# Altium PCB 3phasedriver_rev2.PcbDoc
Units mm, origin at the board's own origin, x right, y up, seen from the top; angles counter-clockwise.
Board outline 82.93 x 49.66 mm, 2 copper layers (Top Layer, Bottom Layer); 53 components, 69 nets, 251 pads, 107 vias.
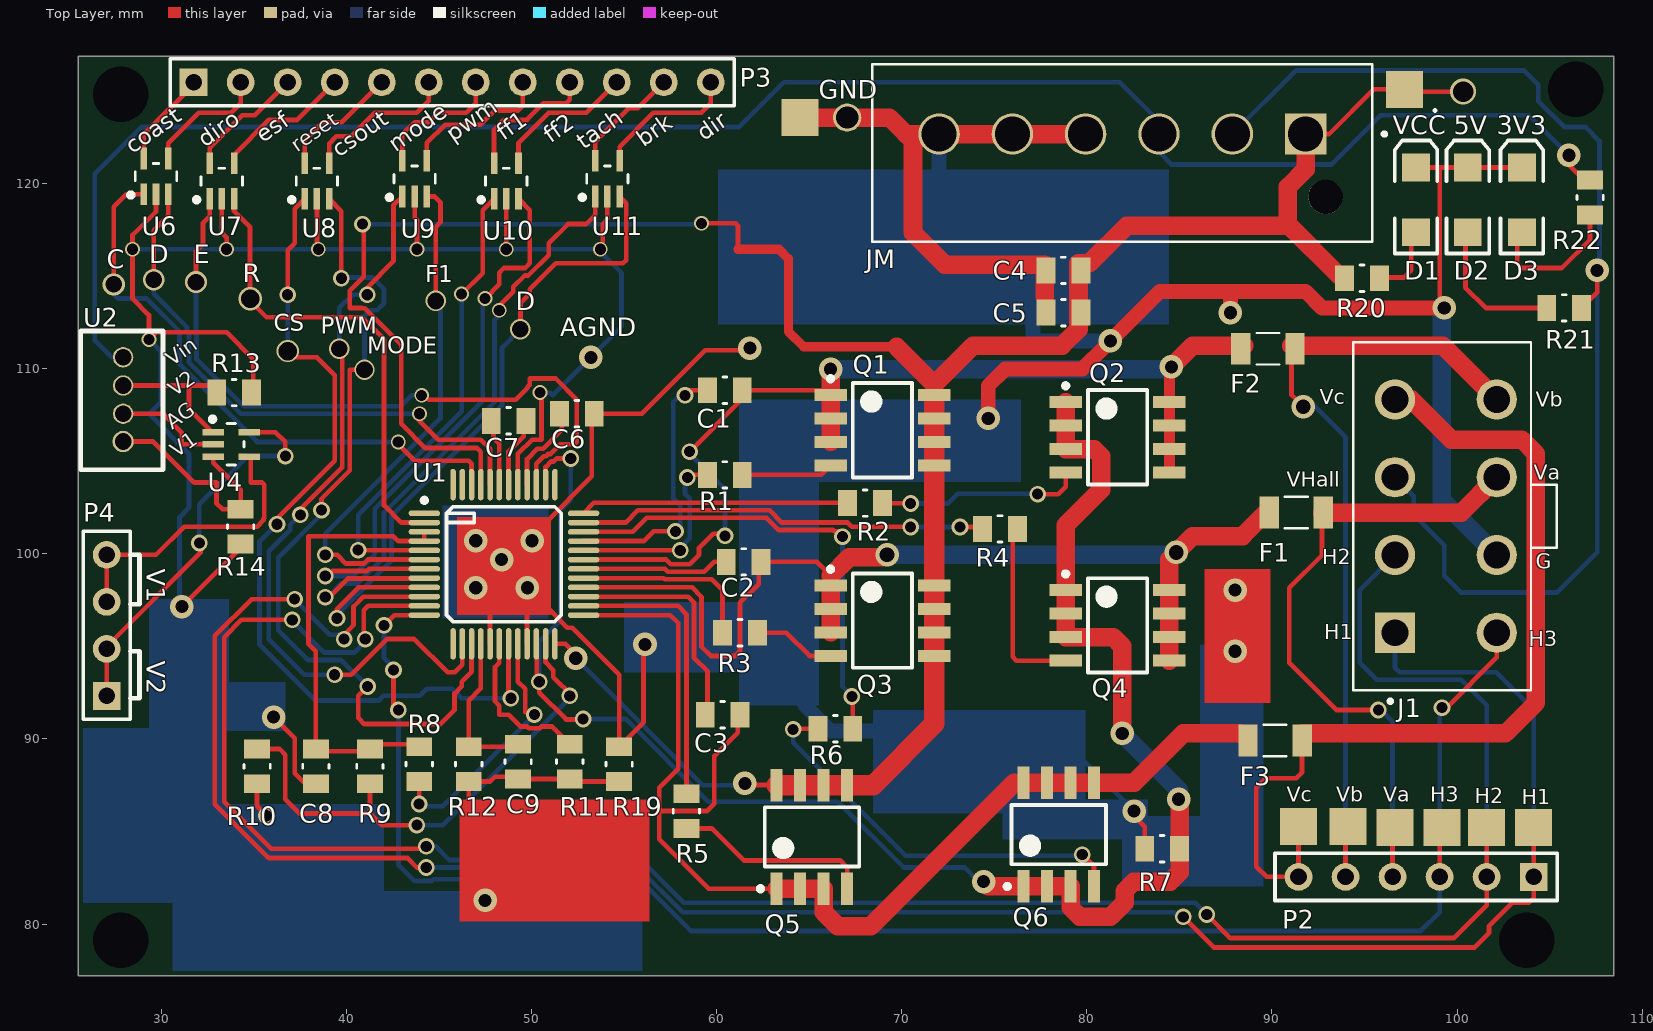
[diagram p0: Top Layer view]
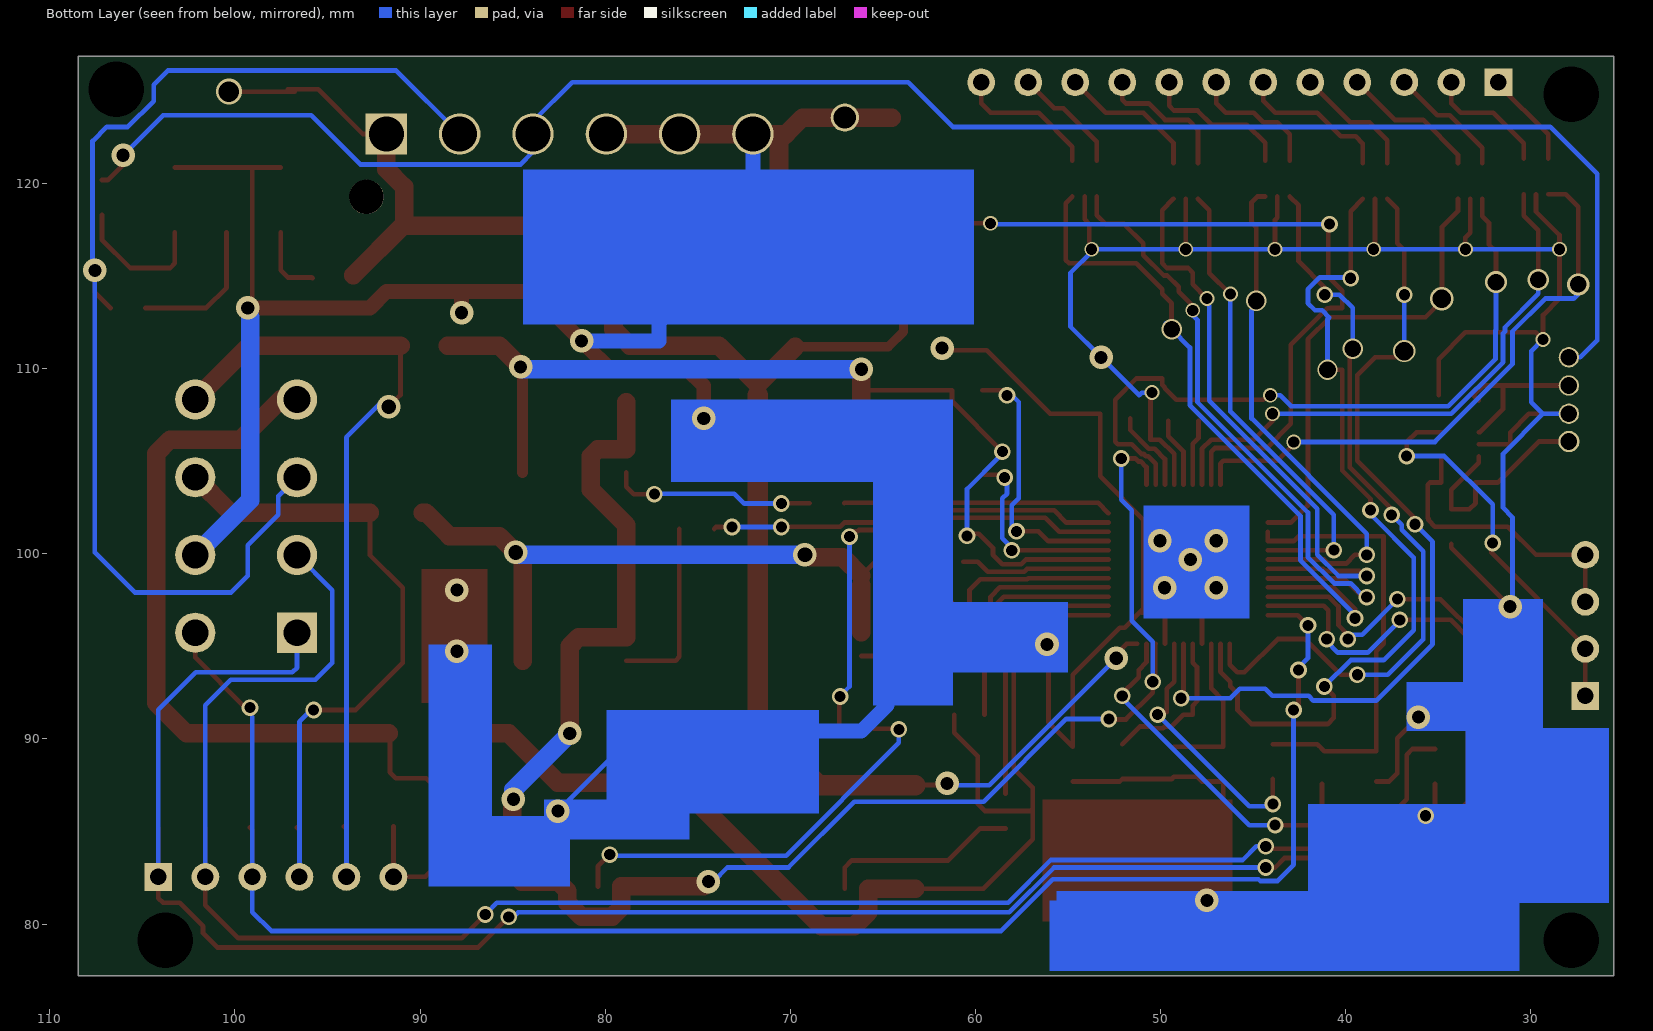
[diagram p1: Bottom Layer view, seen from below]

## Layer stack, top to bottom
Top Solder: solder mask 0.0102, Solder Resist, Dk 3.5
Top Layer: signal copper 0.0356
Dielectric 1: dielectric 0.32, FR-4, Dk 4.8
Bottom Layer: signal copper 0.0356
Bottom Solder: solder mask 0.0102, Solder Resist, Dk 3.5

## Board outline
25.527,126.873 108.458,126.873 108.458,77.216 25.527,77.216

## Design rules (kind name [scope] priority, off if disabled: settings)
Clearance [All] p1: gap=0.15 ignorepadtopadclearanceinfootprint=FALSE except(0: Arc-Hole Track-Hole SMDPad-Hole THPad-Hole Via-Hole Fill-Hole Poly-Hole Region-Hole Text-Hole)
ComponentClearance [All] p1: gap=0.2 collisioncheckmode=3 verticalgap=0.254 showdistances=FALSE
HoleSize [All] p1: absolutevalues=TRUE maxlimit=6 minlimit=0.025 maxpercent=80.000 minpercent=20.000
MinimumSolderMaskSliver [All] p1 off: minsoldermaskwidth=0.14
NetAntennae [All] p1 off: netantennaetolerance=0
PolygonConnect [All] p1: connectstyle=Relief reliefconductorwidth=0.254 reliefentries=4 polygonreliefangle="90 Angle" airgapwidth=0.254
RoutingVias [All] p1: holewidth=0.711 width=1.27 viastyle="Through Hole" minholewidth=0.5 minwidth=1 maxholewidth=4 maxwidth=4
SilkToSilkClearance [All] p1 off: silktosilkclearance=0.254
SilkToSolderMaskClearance [IsPad] p1 off: minsilkscreentomaskgap=0.1 clearancetoexposedcopper=TRUE
SolderMaskExpansion [All] p1: expansion=0.102
Width [All] p1: maxlimit=2 minlimit=0.2 preferedwidth=0.254
24 further rules are at their usual default settings.

## Components (designator, comment, footprint, x,y, rotation, side; value= is the part's Value field where it differs from the comment)
C1 "82nF" 0805 60.452,108.839 r0 top
C2 "82nF" 0805 61.468,99.568 r0 top
C3 "82nF" 0805 60.325,91.313 r0 top
C4 "1uF" 0805 78.74,115.316 r0 top
C5 "1uF" 0805 78.74,113.03 r0 top
C6 "1uF" 0805 52.451,107.569 r180 top
C7 "100nF" 0805 48.768,107.188 r0 top
C8 "1uF" 0805 38.354,88.519 r90 top
C9 "1nF" 0805 49.276,88.773 r90 top
D1 "LED2" 3.2X1.6X1.1 97.79,119.126 r90 top
D2 "LED2" 3.2X1.6X1.1 100.584,119.126 r90 top
D3 "LED2" 3.2X1.6X1.1 103.505,119.126 r90 top
F1 "Fuse 10A 1206" 1206 91.313,102.235 r0 top
F2 "Fuse 10A 1206" 1206 89.789,111.079 r0 top
F3 "Fuse 10A 1206" 1206 90.17,89.916 r0 top
J1 "Motor Molex Connector" *MOLEX_0039281083 99.397,102.04 r90 top value=N/A
JM "CONN HEADER VERT 6POS 3.96MM" "CONN HDR 6POS 3.96MM" 91.821,122.682 r180 top
P2 "Header 6" HDR1X6 104.14,82.55 r180 top
P3 "Header 12" HDR1X12 31.75,125.476 r0 top
P4 "Header 4" HDR1X4 27.051,92.329 r90 top
Q1 "N-Channel" "8-SOIC MOSFET" 68.961,106.68 r0 top
Q2 "N-Channel" "8-SOIC MOSFET" 81.661,106.299 r0 top
Q3 "N-Channel" "8-SOIC MOSFET" 68.961,96.393 r0 top
Q4 "N-Channel" "8-SOIC MOSFET" 81.661,96.139 r0 top
Q5 "N-Channel" "8-SOIC MOSFET" 65.151,84.709 r90 top
Q6 "N-Channel" "8-SOIC MOSFET" 78.486,84.836 r90 top
R1 "0 Ohm" RESC2013X65N 60.452,104.267 r180 top value=0
R2 "0 Ohm" RESC2013X65N 68.021,102.743 r180 top value=0
R3 "0 Ohm" RESC2013X65N 61.265,95.74 r180 top value=0
R4 "0 Ohm" RESC2013X65N 75.311,101.346 r180 top value=0
R5 "0 Ohm" RESC2013X65N 58.374,86.106 r90 top value=0
R6 "0 Ohm" RESC2013X65N 66.421,90.551 r0 top value=0
R7 "20mOhm" 0805 84.074,84.074 r0 top
R8 "100k" 0805 43.936,88.646 r270 top
R9 "150k" 0805 41.275,88.519 r270 top
R10 "10k" 0805 35.179,88.519 r270 top
R11 "5.1k" 0805 52.07,88.773 r270 top
R12 "47k" RESC2013X65N 46.609,88.646 r270 top
R13 "5.1k" 0805 33.934,108.712 r180 top
R14 "5.1k" 0805 34.29,101.473 r90 top
R19 "0 Ohm" RESC2013X65N 54.737,88.646 r90 top value=0
R20 "1.96K" 0805 94.869,114.889 r0 top value=1.96k
R21 "270" 0805 105.791,113.284 r180 top
R22 "110" 0805 107.188,119.253 r270 top
U1 "A3931" CQFP50P900X900X160-48N 48.514,99.441 r0 top
U2 "Encoder" EncoderConnector 27.813,108.99 r90 top value=N/A
U4 "EMI" SOT-665 33.782,105.918 r0 top
U6 "EMI" SOT-665 29.718,120.396 r90 top
U7 "EMI" SOT-665 33.274,120.142 r90 top
U8 "EMI" SOT-665 38.411,120.142 r90 top
U9 "EMI" SOT-665 43.688,120.269 r90 top
U10 "EMI" SOT-665 48.641,120.142 r90 top
U11 "EMI" SOT-665 54.102,120.269 r90 top

## Footprints (in the part's own frame and the unit in brackets; to place one, negate y for a bottom-side part, rotate by r counter-clockwise, add the part's x,y. Pads: shape width x height; smd on the part's side, far side on the other; paste and mask are expansions set on the pad)
3.2X1.6X1.1 [mm]
  rect 1.5x1.5 smd: 1(-1.75,0) 2(1.75,0)
  silkscreen extent -2.9,-1.15 3.2,1.15
"8-SOIC MOSFET" [mm]
  rect 1.75x0.65 smd: D(2.8,-1.905) D(2.8,-0.635) D(2.8,0.635) D(2.8,1.905) G(-2.8,-1.905) S(-2.8,-0.635) S(-2.8,0.635) S(-2.8,1.905)
  silkscreen extent -2.92,-2.55 1.6,2.9, body extent -2,-2.55 2,2.55, height 1.7
0805 [mil]
  rect 40x55 smd: 1(-37,0) 2(37,0)
  silkscreen extent -4,-28 4,28
1206 [mm]
  rect 1.05x1.72 smd: 1(-1.46,0) 2(1.46,0)
  silkscreen extent -0.62,-0.85 0.62,0.85
*MOLEX_0039281083 [mm]
  rect 2.175x2.175 hole 1.45: 1(-6.3,2.75)
  round 2.175 hole 1.45: 2(-2.1,2.75) 3(2.1,2.75) 4(6.3,2.75) 5(-6.3,-2.75) 6(-2.1,-2.75) 7(2.1,-2.75) 8(6.3,-2.75)
  silkscreen extent -10.1,-6 9.4,5
"CONN HDR 6POS 3.96MM" [mm]
  rect 2.24x2.24 hole 1.89: 1(0,0)
  round 2.24 hole 1.89: 2(3.96,0) 3(7.92,0) 4(11.88,0) 5(15.84,0) 6(19.8,0)
  round 1.86 hole 1.86 unplated: None(-1.08,3.4)
  silkscreen extent -4.36,-3.76 23.41,5.82
CQFP50P900X900X160-48N [mm]
  oval 1.7x0.3 smd: 1(-4.3,2.75) 2(-4.3,2.25) 3(-4.3,1.75) 4(-4.3,1.25) 5(-4.3,0.75) 6(-4.3,0.25) 7(-4.3,-0.25) 8(-4.3,-0.75) 9(-4.3,-1.25) 10(-4.3,-1.75) 11(-4.3,-2.25) 12(-4.3,-2.75) 25(4.3,-2.75) 26(4.3,-2.25) 27(4.3,-1.75) 28(4.3,-1.25) 29(4.3,-0.75) 30(4.3,-0.25) 31(4.3,0.25) 32(4.3,0.75) 33(4.3,1.25) 34(4.3,1.75) 35(4.3,2.25) 36(4.3,2.75)
  oval 0.3x1.7 smd: 13(-2.75,-4.3) 14(-2.25,-4.3) 15(-1.75,-4.3) 16(-1.25,-4.3) 17(-0.75,-4.3) 18(-0.25,-4.3) 19(0.25,-4.3) 20(0.75,-4.3) 21(1.25,-4.3) 22(1.75,-4.3) 23(2.25,-4.3) 24(2.75,-4.3) 37(2.75,4.3) 38(2.25,4.3) 39(1.75,4.3) 40(1.25,4.3) 41(0.75,4.3) 42(0.25,4.3) 43(-0.25,4.3) 44(-0.75,4.3) 45(-1.25,4.3) 46(-1.75,4.3) 47(-2.25,4.3) 48(-2.75,4.3)
  silkscreen extent -4.42,-3.1 3.1,3.57, body extent -3.5,-3.5 3.5,3.5, height 1.6
EncoderConnector [mm] "CONN HEADER R/A 4POS 1.5MM"
  round 1.1 hole 0.9: 5V(1.627,-0.127) GND(-1.421,-0.127) VIN2(0.103,-0.127)
  round 1.15 hole 0.9: VIN1(-2.921,-0.127)
  silkscreen extent -4.44,-2.29 3.06,2.16
HDR1X4 [mm] "Connector; Header; 4 Position"
  rect 1.5x1.5 hole 0.9: 1(0,0)
  round 1.5 hole 0.9: 2(2.54,0) 3(5.08,0) 4(7.62,0)
  silkscreen extent -1.27,-1.27 8.89,1.27
HDR1X6 [mm] "Connector; Header; 6 Position"
  rect 1.5x1.5 hole 0.9: 1(0,0)
  round 1.5 hole 0.9: 2(2.54,0) 3(5.08,0) 4(7.62,0) 5(10.16,0) 6(12.7,0)
  silkscreen extent -1.27,-1.27 13.97,1.27
HDR1X12 [mm] "Connector; Header; 12 Position"
  rect 1.5x1.5 hole 0.9: 1(0,0)
  round 1.5 hole 0.9: 2(2.54,0) 3(5.08,0) 4(7.62,0) 5(10.16,0) 6(12.7,0) 7(15.24,0) 8(17.78,0) 9(20.32,0) 10(22.86,0) 11(25.4,0) 12(27.94,0)
  silkscreen extent -1.27,-1.27 29.21,1.27
RESC2013X65N [mil]
  rect 40x55 smd: 1(-37,0) 2(37,0)
  silkscreen extent -4,-28 4,28
SOT-665 [mil]
  rect 46x14 smd: 1(-38,26) 2(-38,0) 3(-38,-26) 4(38,-26) 5(38,26)
  silkscreen extent -45,-44 27,59

## Part data
C1 C2 C3: library part "CAP 82nF 0805", "0.082µF ±5% 50V Ceramic Capacitor X7R 0805 (2012 Metric)", Package=0805, Rating=50V, Tolerance=5%, Digikey=311-4285-1-ND, Digikey Link=https://www.digikey.ca/product-detail/en/yageo/CC0805JRX7R9BB823/311-4285-1-ND/8025374, MF=Yageo, MP=CC0805JRX7R9BB823, Price="0.223 CAD"
C4 C5 C6 C8: library part "CAP 1uF 0805", "CAP CER 1UF 50V X7R 0805", Package=0805, Rating=50V, Tolerance=10%, Digikey=1276-1029-1-ND, Digikey Link=https://www.digikey.ca/product-detail/en/samsung-electro-mechanics/CL21B105KBFNNNE/1276-1029-1-ND/3889115, MF="Samsung Electro-Mechanics", MP=CL21B105KBFNNNE, Price="0,172 CAD"
C7: library part "CAP 100nF 0805", "CAP CER 0.1UF 50V X7R 0805", Package=0805, Rating=50V, Tolerance=10%, Digikey=311-1140-1-ND, Digikey Link=https://www.digikey.ca/products/en?keywords=311-1140-1-ND, MF=Yageo, MP=CC0805KRX7R9BB104, Price="0,119 CAD"
C9: library part "CAP 1nF 0805", "CAP CER 1000PF 50V X7R 0805", Package=0805, Rating=50V, Tolerance=10%, Digikey=311-1127-1-ND, Digikey Link=https://www.digikey.ca/products/en?keywords=311-1127-1-ND, MF=Yageo, MP=CC0805KRX7R9BB102, Price="0.1 CAD"
D1 D2 D3: library part "LED GREEN SMD", "Typical RED, GREEN, YELLOW, AMBER GaAs LED", Package=0603, Rating=2V, Digikey=160-1446-1-ND, Digikey Link=https://www.digikey.ca/products/en?keywords=160-1446-1-ND, MF="Lite-On Inc.", MP=LTST-C191KGKT
F1 F2 F3: "10A 32V AC 63V DC Fuse Board Mount (Cartridge Style Excluded) Surface Mount 1206 (3216 Metric)", Rating=10A, Digikey=486-1686-1-ND, Digikey Link=https://www.digikey.ca/products/en?keywords=486-1686-1-ND, MF="Schurter Inc.", MP=3413.0328.22
J1: library part "Motor Molex", "Connector Header Through Hole 8 position 0.165\" (4.20mm)", Digikey=WM3803-ND, Digikey Link=https://www.digikey.ca/products/en?keywords=WM3803-ND, MF=Molex, MP=0039281083, Price="1.624 CAD"
JM: "Connector Header Through Hole 6 position 0.156\" (3.96mm)", Current Rating=7.5A, Voltage Rating=250VAC, Digikey=https://www.digikey.ca/product-detail/en/te-connectivity-amp-connectors/1877285-6/A99849-ND/2000097, Digikey Link=A99849-ND, MF="TE Connectivity", MP=1877285-6, SnapEDA_Link=https://www.snapeda.com/parts/1877285-6/TE%20Connectivity/view-part/2371244/?ref=snap
P2: "Header, 6-Pin", LatestRevisionDate=17-Jul-2002, LatestRevisionNote="Re-released for DXP Platform.", Publisher="Altium Limited"
P3: "Header, 12-Pin", LatestRevisionDate=17-Jul-2002, LatestRevisionNote="Re-released for DXP Platform.", Publisher="Altium Limited"
P4: "Header, 4-Pin", LatestRevisionDate=17-Jul-2002, LatestRevisionNote="Re-released for DXP Platform.", Publisher="Altium Limited"
Q1 Q2 Q3 Q4 Q5 Q6: library part "Mosfet N Channel 8-SOIC", "MOSFET N-CH 30V 18.5A 8-SOIC", Package=8-SOIC, Rating=30V, Digikey=FDS8813NZCT-ND, Digikey Link=https://www.digikey.ca/product-detail/en/on-semiconductor/FDS8813NZ/FDS8813NZCT-ND/1626932, MF="ON Semiconductor", MP=FDS8813NZ, Price="1.727 CAD"
R1 R2 R3 R4 R5 R6 R19: library part "RES 0 Ohm 0805", "RES SMD 0 OHM JUMPER 1/8W 0805", Package=0805, Rating=0.125W, Digikey=311-0.0ARCT-ND, Digikey Link=https://www.digikey.ca/products/en?keywords=311-0.0ARCT-ND, MF=Yageo, MP=RC0805JR-070RL, Price="0.058 CAD"
R7: library part "RES 20mOhm 0805", "RES 0.02 OHM 1% 1/2W 0805", Package=0805, Rating=0.5W, Tolerance=1%, Digikey=P.02AQCT-ND, Digikey Link=https://www.digikey.ca/products/en?keywords=P.02AQCT-ND, MF="Panasonic Electronic Components", MP=ERJ-6BWFR020V, Price="0.088 CAD"
R8: library part "RES 100k 0805", "RES SMD 100K OHM 1% 1/8W 0805", Package=0805, Rating=0.125W, Tolerance=1%, Digikey=311-100KCRCT-ND, Digikey Link=https://www.digikey.ca/products/en?keywords=311-100KCRCT-ND, MF=Yageo, MP=RC0805FR-07100KL, Price="0.058 CAD"
R9: library part "RES 150k 0805", "RES SMD 150K OHM 1% 1/8W 0805", Package=0805, Rating=0.125W, Tolerance=1%, Digikey=311-150KCRCT-ND, Digikey Link=https://www.digikey.ca/products/en?keywords=311-150KCRCT-ND, MF=Yageo, MP=RC0805FR-07150KL, Price="0.061 CAD"
R10: library part "RES 10k 0805", "RES SMD 10K OHM 1% 1/8W 0805", Package=0805, Rating=0.125W, Tolerance=1%, Digikey=311-10.0KCRCT-ND, Digikey Link=https://www.digikey.ca/products/en?keywords=311-10.0KCRCT-ND, MF=Yageo, MP=RC0805FR-0710KL, Price="0.061 CAD"
R11 R13 R14: library part "RES 5.1k 0805", "RES SMD 5.1K OHM 1% 1/8W 0805", Package=0805, Rating=0.125W, Tolerance=1%, Digikey=311-5.10KCRDKR-ND, Digikey Link=https://www.digikey.ca/products/en?keywords=311-5.10KCRDKR-ND, MF=Yageo, MP=RC0805FR-075K1L, Price="0.061 CAD"
R12: library part RC0805FR-072K2L, "47 kOhms ±1% 0.125W, 1/8W Chip Resistor 0805 (2012 Metric) Moisture Resistant Thick Film", Package="0805 (2012 Metric)", Digikey=311-47.0KCRCT-ND, Digikey Link=https://www.digikey.ca/product-detail/en/yageo/RC0805FR-0747KL/311-47.0KCRCT-ND/730920, MF=Yageo, MP=RC0805FR-0747KL, Price="0.061 CAD"
R20: library part "RES 1.96k 0805", "RES SMD 1.96K OHM 1% 1/8W 0805", Package=0805, Rating=0.125W, Tolerance=1%, Digikey=P1.96KCCT-ND, Digikey Link=https://www.digikey.ca/product-detail/en/panasonic-electronic-components/ERJ-6ENF1961V/P1.96KCCT-ND/119041, MF="Panasonic Electronic Components", MP=ERJ-6ENF1961V, Price="0.15 CAD"
R21: library part "RES 270 0805", "RES SMD 270 OHM 5% 1/8W 0805", Package=0805, Rating=0.125W, Digikey=311-270ARCT-ND, Digikey Link=https://www.digikey.ca/product-detail/en/yageo/RC0805JR-07270RL/311-270ARCT-ND/731238, MF=Yageo, MP=RC0805JR-07270RL, Price="0.054 CAD"
R22: library part "RES 110 0805", "RES SMD 110 OHM 1% 1/8W 0805", Package=0805, Rating=0.125W, Tolerance=1%, Digikey=311-110CRCT-ND, Digikey Link=https://www.digikey.ca/product-detail/en/yageo/RC0805FR-07110RL/311-110CRCT-ND/730506, MF=Yageo, MP=RC0805FR-07110RL, Price="0.15 CAD"
U1: library part "MotorDriver A3931", "IC MOTOR DRIVER 5.5V-50V 48LQFP", Rating="5.5V ~ 50V", Digikey=620-1290-1-ND, Digikey Link=https://www.digikey.com/product-detail/en/allegro-microsystems-llc/A3931KJPTR-T/620-1290-1-ND/2000021, MF="Allegro MicroSystems", MP=A3931KJPTR-T, Price="8.948 CAD"
U2: library part "Encoder Connector", "CONN HEADER R/A 4POS 1.5MM", Package=N/A, Rating=1A, Digikey=455-1671-ND, Digikey Link=https://www.digikey.ca/products/en?keywords=455-1671-ND, MF="JST Sales America Inc.", MP=S4B-ZR(LF)(SN), Price="0.324 CAD"
U4 U6 U7 U8 U9 U10 U11: library part IP4256CZ5-W, "RC (Pi) EMI Filter 2nd Order Low Pass 2 Channel R = 100Ohms, C = 19pF (Total)  SOT-665", Package=SOT-665, Digikey=1727-4718-1-ND, Digikey Link=https://www.digikey.ca/product-detail/en/nexperia-usa-inc/IP4256CZ5-W115/1727-4718-1-ND/2531158, MF="Nexperia USA Inc.", MP=IP4256CZ5-W,115, Price="0.17 CAD", SnapEDA_Link=https://www.snapeda.com/parts/IP4256CZ5-W/Nexperia%20USA%20Inc./view-part/3605439/?ref=snap

## Free pads (board coordinates)
  round 1.524 hole 3: 2(27.813,79.121) 2(27.813,124.841) 2(103.759,79.121) 2(106.426,125.095)
  round 1.524 hole 1.2: 3(67.056,123.571)
  rect 2x2 smd: 4(97.155,125.095) 5(91.44,85.268) 5(94.107,85.268) 5(96.647,85.217) 5(99.187,85.217) 5(101.6,85.217) 5(104.14,85.217) ""(64.516,123.571)

## Via types
v1: diameter 0.9, hole 0.6, Top Layer to Bottom Layer, tented both sides, 52 vias
v2: diameter 1.27, hole 0.711, Top Layer to Bottom Layer, 27 vias
v3: diameter 0.8, hole 0.6, Top Layer to Bottom Layer, tented both sides, 15 vias
v4: diameter 1.1, hole 0.9, Top Layer to Bottom Layer, 4 vias
v5: diameter 1.27, hole 0.8, Top Layer to Bottom Layer, 3 vias
v6: diameter 1.2, hole 0.9, Top Layer to Bottom Layer, 2 vias
v7: diameter 1.4, hole 1.1, Top Layer to Bottom Layer, 1 vias
v8: diameter 1.27, hole 1, Top Layer to Bottom Layer, 1 vias
v9: diameter 1.2, hole 1, Top Layer to Bottom Layer, 1 vias
v10: diameter 1.15, hole 0.9, Top Layer to Bottom Layer, 1 vias

## Nets (pads, with @x,y where several pads share a name; then routed paths per layer and width w, separated by ;. In a path a pad name is that pad's centre, name@x,y a point inside that pad or via, vN(x,y) a via of type N, cw(c..) or ccw(c..) an arc to the next point about the centre after c; other vN are vias at no path point)
3V3: JM.3 R22.1 U2.5V | length 99.6
  Top Layer w0.254: v2(106.045,121.539) 106.045,121.031 106.883,120.193 R22.1
  Bottom Layer w0.254: U2.5V 27.328,110.617 26.416,111.529 26.416,120.523 28.956,123.063 61.214,123.063 63.627,125.476 81.788,125.476 83.901,123.363 JM.3 83.901,121.712 84.582,121.031 93.218,121.031 95.885,123.698 103.886,123.698 v2(106.045,121.539) v2@105.791,121.539
5V: J1.3 JM.2 R21.1 | length 64.5
  Top Layer w0.254: JM.2 JM.2@87.861,123.548 ; R21.1 107.569,114.122 v2(107.569,115.316)
  Bottom Layer w0.254: JM.2 91.29,126.111 103.632,126.111 104.394,125.349 104.394,124.46 105.791,123.063 106.934,123.063 107.696,122.301 v2@107.696,115.57 ; J1.3 97.663,103.124 97.663,102.108 99.314,100.457 99.314,98.806 100.203,97.917 105.41,97.917 107.569,100.076 v2(107.569,115.316)
AGND: C8.1 C9.1 R10.2 R11.2 R12.2 R13.1 R14.1 R19.1 U1.41 U2.GND U4.2 U6.2 U7.2 U8.2 U9.2 U10.2 U11.2 | length 122
  Top Layer w0.254: U2.GND 30.099,107.569 31.115,106.553 31.115,105.918 U4.2 ; U6.2 29.718,118.491 28.453,117.226 v3(28.453,116.459) 28.453,113.787 29.337,112.903 29.337,111.582 v3(29.342,111.587) 29.723,111.968 33.528,111.968 34.976,110.52 R13.1@34.976,108.566 ; v2(31.115,97.155) 34.29,100.33 R14.1 ; U7.2 33.274,117.348 33.533,117.089 v3(33.533,116.459) ; R10.2 35.179,86.36 v1@35.56,85.979 ; v2@36.195,91.055 37.211,90.039 37.211,88.138 37.643,87.706 C8.1@38.354,87.706 ; U8.2 38.411,116.534 v3(38.486,116.459) ; U9.2 43.688,118.167 43.815,118.04 43.815,116.464 v3(43.82,116.459) ; v2(47.498,81.28) 46.609,82.169 R12.2 47.777,87.706 48.031,87.96 49.276,87.96 49.403,87.833 R11.2 52.197,87.706 R19.1 ; v3(48.641,116.459) U10.2 ; U1.41 49.264,105.398 50.038,106.172 50.546,106.172 v3@50.546,108.458 ; v2@53.213,110.82 v2(53.213,110.617) v2@53.34,110.49 ; 53.848,116.84 53.848,117.82 54.102,118.074 U11.2
  Bottom Layer w0.254: U2.GND 29.342,107.569 ; v3(28.453,116.459) v3(33.533,116.459) v3(38.486,116.459) v3(43.82,116.459) v3(48.641,116.459) v3(53.721,116.459) ; v3(29.342,111.587) 29.972,110.957 29.972,108.199 29.342,107.569 ; v2@30.988,97.409 30.988,101.981 31.496,102.489 31.496,105.415 29.342,107.569 ; v3(50.454,108.712) 51.016,108.712 51.162,108.566 v2(53.213,110.617) 54.864,112.268 54.864,115.189 v3@53.721,116.332
  other v1: 35.681,85.852
  other v2: 36.068,91.186
BRAKE: U1.8 U11.1 | length 34.3
  Top Layer w0.254: v1@39.081,97.663 40.086,98.668 44.191,98.668 U1.8 ; v3(48.26,113.157) 48.26,113.411 49.022,114.173 49.022,114.427 49.634,115.039 49.824,115.039 50.927,116.142 50.927,116.768 51.979,117.82 52.959,117.82 53.442,118.303 U11.1
  Bottom Layer w0.254: v1(38.862,97.663) 38.989,97.663 39.728,98.402 40.617,98.402 42.037,99.822 42.037,102.235 48.006,108.204 48.006,112.649 v3@48.26,112.903
CA: C1.1 U1.33 | length 15
  Top Layer w0.254: U1.33 56.067,100.691 56.595,101.219 v1(57.785,101.219) ; v1(58.294,108.561) 58.572,108.839 C1.1@59.639,108.839
  Bottom Layer w0.254: v1(57.785,101.219) 57.889,101.219 58.039,101.069 58.039,102.616 57.658,102.997 57.658,108.204 v1@58.166,108.712
CB: C2.1 U1.30 | length 8.1
  Top Layer w0.254: U1.30 57.21,99.191 57.364,99.037 59.337,99.037 59.868,99.568 C2.1@60.655,99.568
CC: C3.1 U1.27 | length 12.5
  Top Layer w0.254: U1.27 58.463,97.691 58.778,97.376 58.778,94.384 59.512,93.65 C3.1@59.512,91.313
COAST: U1.46 U6.1 | length 31.5
  Top Layer w0.254: v6(27.432,114.558) 27.432,118.745 28.118,119.431 U6.1 ; v3@42.962,105.755 43.688,105.029 46.609,105.029 46.764,104.874 U1.46
  Bottom Layer w0.254: v6@27.178,114.3 27.686,113.792 29.21,113.792 30.988,112.014 30.988,110.236 35.179,106.045 v3(42.804,106.045)
CP1: C7.2 U1.42 | length 3.8
  Top Layer w0.254: U1.42 48.764,105.533 49.581,106.35 C7.2@49.581,107.188
CP2: C7.1 U1.43 | length 3.6
  Top Layer w0.254: C7.1@47.955,107.188 47.955,106.248 48.264,105.939 U1.43
CSN: C4.1 C5.1 C6.1 D1.2 D2.2 D3.2 J1.6 JM.4 JM.5 JM.6 pad. pad.3 R7.1 R19.2 U1.17 U1.21 | length 183.5
  Top Layer w0.254: U1.17 47.764,97.028 ; U1.21 49.764,97.028 ; 50.764,101.691 53.264,104.191 53.264,107.569 C6.1 55.967,107.569 59.396,110.998 v2@61.595,110.998 ; 50.927,97.028 51.943,96.012 52.197,96.012 54.737,93.472 R19.2 56.058,90.907 v2@56.058,94.869 ; v2@82.677,85.725 83.134,85.268 R7.1 ; D1.2@97.536,120.876 99.06,120.876 ; v2(99.314,113.284) 99.06,113.538 99.06,120.876 ; D3.2@103.251,120.876 99.06,120.876
  Top Layer w0.8: v2(74.676,107.315) 74.676,109.074 75.59,109.988 79.762,109.988 v2@81.026,111.252 ; v2(81.28,111.506) 83.947,114.173 87.757,114.173 ; v2(87.757,113.03) 87.757,114.173 ; v2(99.314,113.284) 92.71,113.284 91.821,114.173 87.757,114.173
  Top Layer w1: pad. pad.3 69.342,123.571 70.231,122.682 ; 77.724,113.919 77.724,115.621 72.339,115.621 70.612,117.348 70.612,122.301 70.231,122.682 ; JM.4 JM.5 JM.6 70.231,122.682
  Bottom Layer w0.254: 68.336,107.315 v2(74.676,107.315) ; 78.238,90.424 v2(82.556,86.106) 83.572,85.09 85.979,85.09 87.122,86.233 87.122,93.853 v2(88.011,94.742)
  Bottom Layer w0.8: 64.77,91.821 66.167,90.424 78.238,90.424 ; JM.6 72.021,117.59 77.089,112.522 77.089,111.506 v2(81.28,111.506)
  Bottom Layer w1: v2@99.187,112.776 99.187,102.9 J1.6
  other v2: 56.134,95.113 88.011,98.044 46.99,98.171 49.784,98.171 48.387,99.695 46.99,100.711 50.038,100.711 61.803,111.119
CSOUT: U1.19 U8.1 | length 45.4
  Top Layer w0.254: v1(36.25,101.6) 36.25,101.909 39.37,105.029 39.37,109.658 38.411,110.617 37.211,110.617 v9@36.957,110.871 ; v1(36.83,114) 36.83,116.392 37.211,116.773 37.211,118.637 U8.1 ; v1@48.764,92.587 U1.19
  Bottom Layer w0.254: v1(36.25,101.6) 35.306,100.656 35.306,95.123 38.354,92.075 41.75,92.075 42.004,92.329 43.97,92.329 44.351,92.71 45.715,92.71 46.223,92.202 v1(48.889,92.202) ; v9(36.83,110.952) v1@36.83,113.792
CSP: Q2.S Q4.S Q6.S R7.2 U1.22 U1.38 | length 90.2
  Top Layer w0.254: U1.22 50.292,95.113 v1@50.292,93.218 ; v1(50.42,93.091) 50.42,92.506 51.871,91.055 v1@52.705,91.055 ; U1.38 50.764,104.706 50.794,104.706 51.082,104.994 51.209,104.994 51.371,105.156 v1@51.979,105.156 ; v2(74.422,82.296) v2@74.682,82.036
  Top Layer w1: v2@74.682,82.036 76.581,82.036 77.851,82.036 79.121,82.036 79.121,80.899 79.629,80.391 81.28,80.391 82.042,81.153 82.042,81.788 82.55,82.296 84.506,82.296 85.014,82.804 R7.2 v2@85.014,86.441 ; Q2.S@78.861,108.204 78.861,106.934 78.861,105.664 80.391,105.664 80.772,105.283 80.772,103.47 78.861,101.559 78.861,98.044 78.861,96.774 78.861,95.504 81.427,95.504 81.915,95.016 v2(81.915,90.297)
  Bottom Layer w0.254: v1(50.42,93.091) 50.42,95.251 51.562,96.393 51.562,102.362 52.122,102.922 v1(52.122,105.156) ; v1(52.795,91.082) 55.095,91.082 59.563,86.614 66.548,86.614 70.104,83.058 73.406,83.058 v2@74.168,82.296 ; v2(84.963,86.741) v2@84.963,87.249
  Bottom Layer w1: v2@82.169,90.043 v2@84.963,87.249
DIR: U1.9 U11.3 | length 37.7
  Top Layer w0.254: v1(39.497,96.52) 39.497,97.028 40.66,98.191 U1.9 ; v4(49.403,112.141) 49.403,113.538 49.911,114.046 49.911,114.3 51.308,115.697 54.94,115.697 55.118,115.875 55.118,118.948 U11.3
  Bottom Layer w0.254: v1(39.497,96.52) 39.497,96.711 42.441,99.655 42.441,102.068 48.41,108.037 48.41,111.148 v4(49.403,112.141) v4@49.721,112.459
DIRO: U1.44 U6.3 | length 30.2
  Top Layer w0.254: v10(29.596,114.808) 29.596,117.475 29.591,117.475 30.378,118.262 U6.3 ; v3@43.942,107.442 43.942,107.188 44.958,106.172 47.268,106.172 47.764,105.676 U1.44
  Bottom Layer w0.254: v10@29.591,114.554 29.591,114.046 31.392,112.245 31.392,112.014 31.496,111.91 31.496,110.363 34.29,107.569 v3(43.947,107.569)
ESF: U1.39 U7.1 | length 37.7
  Top Layer w0.254: v6(31.882,114.681) 31.882,116.337 32.258,116.713 32.258,117.881 32.614,118.237 U7.1 ; v3@44.323,108.458 44.45,108.331 49.149,108.331 49.777,108.959 49.777,108.992 49.911,109.126 49.911,109.474 51.308,109.474 52.451,108.331 52.451,106.069 52.303,105.921 52.303,105.918 51.562,105.918 51.042,105.398 50.915,105.398 50.796,105.279 50.669,105.279 50.264,104.874 U1.39
  Bottom Layer w0.254: v6@31.877,114.554 31.877,112.1 31.9,112.077 31.9,110.53 34.457,107.973 42.949,107.973 43.542,108.566 v3(44.069,108.566)
GHA: R1.2 U1.32 | length 10.5
  Top Layer w0.254: U1.32 v1(58.039,100.191) ; v1(58.42,104.128) 58.559,104.267 R1.2
  Bottom Layer w0.254: v1(58.039,100.191) 58.039,100.33 58.547,100.838 58.547,102.998 58.294,103.251 v1@58.294,104.013
GHB: R3.2 U1.29 | length 10.1
  Top Layer w0.254: U1.29 57.138,98.691 57.196,98.633 59.736,98.633 60.325,98.044 R3.2
GHC: R5.2 U1.26 | length 15.4
  Top Layer w0.254: U1.26 57.923,97.191 58.374,96.74 R5.2
GLA: R2.2 U1.36 | length 14.5
  Top Layer w0.254: U1.36 53.377,102.754 67.07,102.754 R2.2
GLB: R4.2 U1.35 | length 21.6
  Top Layer w0.254: U1.35 55.082,101.691 55.741,102.35 62.863,102.35 63.523,101.691 67.092,101.691 67.31,101.473 70.462,101.473 v1(70.486,101.449) ; v1(73.152,101.449) 74.014,101.449 R4.2@74.117,101.346
  Bottom Layer w0.254: v1(70.486,101.449) v1@72.747,101.449
GLC: R6.2 U1.34 | length 24.9
  Top Layer w0.254: U1.34 55.471,101.191 56.226,101.946 62.696,101.946 63.355,101.287 66.294,101.287 66.362,101.219 v1@66.675,101.219 ; v1(67.311,92.297) 67.361,92.247 R6.2
  Bottom Layer w0.254: v1(66.803,100.933) 66.803,92.836 v1@67.183,92.456
M1FF1: U1.6 U9.3 | length 27.8
  Top Layer w0.254: v1@39.116,99.949 39.497,99.949 39.97,99.476 40.941,99.476 41.156,99.691 U1.6 ; U9.3 44.78,119.304 45.085,118.999 45.085,117.911 44.831,117.657 v4(44.831,113.665)
  Bottom Layer w0.254: v1(38.862,99.949) 38.862,101.092 45.085,107.315 45.085,113.157 v4@44.831,113.411
M1FF2: U1.5 U10.1 | length 25.2
  Top Layer w0.254: v1@40.64,100.191 U1.5 ; v3(46.228,114.046) 46.248,114.046 47.371,115.169 47.371,118.567 U10.1
  Bottom Layer w0.254: v1(40.64,100.203) 40.64,102.108 46.228,107.696 v3@46.228,113.665
M1H1: J1.1 P2.1 pad.5@104.14,85.217 U1.10 | length 122.4
  Top Layer w0.254: v1(37.206,97.556) 34.882,97.556 32.893,95.567 32.893,86.487 35.814,83.566 43.307,83.566 43.815,83.058 v1@44.272,83.058 ; v1@39.878,95.631 40.386,96.139 40.386,97.155 40.922,97.691 U1.10 ; v1(85.211,80.391) 86.862,78.74 100.965,78.74 101.727,79.502 101.727,79.883 102.997,81.153 103.886,81.153 104.14,81.407 P2.1 pad.5@104.14,85.217
  Bottom Layer w0.254: v1@37.211,97.536 39.116,95.631 39.644,95.631 v1(39.878,95.397) ; v1(44.317,83.058) 55.753,83.058 58.166,80.645 84.709,80.645 v1@85.09,80.264 ; J1.1 96.647,93.853 96.901,93.599 102.108,93.599 104.14,91.567 P2.1
M1H2: J1.2 P2.2 pad.5@101.6,85.217 U1.11 | length 122.3
  Top Layer w0.254: v1(37.079,96.436) 34.333,96.436 33.401,95.504 33.401,86.614 35.941,84.074 v1@44.069,84.074 ; v1@41.021,95.504 40.941,95.584 40.941,96.948 41.184,97.191 U1.11 ; v1(86.481,80.518) 87.751,79.248 99.822,79.248 101.6,81.026 P2.2 pad.5@101.6,85.217
  Bottom Layer w0.254: v1@37.084,96.393 38.807,94.67 40.418,94.67 41.021,95.273 v1(41.021,95.397) ; v1(44.317,84.201) 44.831,84.201 45.57,83.462 55.92,83.462 58.229,81.153 85.852,81.153 v1@86.36,80.645 ; J1.2 94.742,98.035 94.742,94.107 95.654,93.195 100.226,93.195 101.6,91.821 P2.2
M1H3: J1.5 P2.3 pad.5@99.187,85.217 U1.12 | length 92
  Top Layer w0.254: v1@42.187,96.289 42.589,96.691 U1.12 ; v1(42.545,93.726) 42.545,91.821 v1@42.672,91.694 ; P2.3 99.06,85.09 pad.5@99.187,85.217 ; v1(99.187,91.694) 99.435,91.694 102.147,94.406 J1.5
  Bottom Layer w0.254: v1(42.037,96.139) 42.037,94.361 v1@42.545,93.853 ; v1(42.813,91.567) 42.813,83.199 43.68,82.331 44.618,82.331 44.71,82.423 55.817,82.423 58.611,79.629 98.044,79.629 99.06,80.645 P2.3 99.06,91.186
M1P1: C2.2 F1.1 Q3.S Q4.D U1.28 | length 54.8
  Top Layer w0.254: U1.28 58.674,98.191 59.182,97.683 59.182,94.996 59.69,94.488 61.011,94.488 61.265,94.742 61.265,97.353 62.281,98.369 62.281,99.568 65.405,99.568 66.161,98.812 Q3.S@66.161,98.298 ; v5@84.461,99.701 v5(84.836,100.076)
  Top Layer w1: Q3.S@66.161,95.758 66.161,97.028 Q3.S@66.161,98.298 ; 66.161,98.812 67.171,99.822 v5@68.961,99.822 ; Q4.D@84.461,94.234 84.461,95.504 84.461,96.774 84.461,98.044 v5@84.461,99.701 ; v5(84.836,100.076) 85.725,100.965 88.416,100.965 89.686,102.235 F1.1
  Bottom Layer w1: v5(69.215,99.949) v5@84.7,99.949
M1P2: C1.2 F2.1 Q1.S Q2.D U1.31 | length 55.4
  Top Layer w0.254: U1.31 57.281,99.691 57.531,99.441 58.551,99.441 59.055,99.945 59.055,100.33 59.817,101.092 v1@60.325,101.092 ; v1(58.547,105.525) 61.265,108.243 61.265,108.839 65.907,108.839 Q1.S@66.161,108.585 ; v2@84.461,109.988 v2(84.576,110.103)
  Top Layer w0.6: Q2.D@84.461,104.394 84.461,105.664 84.461,106.934 84.461,108.204 v2@84.461,109.988
  Top Layer w1: Q1.S@66.161,106.045 66.161,107.315 66.161,108.585 v2(66.161,109.976) ; v2(84.576,110.103) 85.725,111.252 F2.1@88.519,111.252
  Bottom Layer w0.254: v1@58.674,105.283 60.452,103.505 v1(60.452,100.973)
  Bottom Layer w1: v2(66.161,109.976) v2@84.449,109.976
M1P3: C3.2 F3.1 Q5.S Q6.D U1.25 | length 64.9
  Top Layer w0.254: U1.25 57.498,96.691 57.923,96.266 57.923,88.403 56.896,87.376 56.896,86.233 ; C3.2@61.138,91.313 61.138,90.348 59.868,89.078 59.868,86.492 59.482,86.106 57.023,86.106 56.896,86.233 ; Q5.S@63.246,81.909 59.569,81.909 56.896,84.582 56.896,86.233 ; 76.085,87.636 Q6.D@76.581,87.636
  Top Layer w1: Q5.S@63.246,81.909 64.516,81.909 65.786,81.909 65.786,80.645 66.548,79.883 68.332,79.883 76.085,87.636 ; Q6.D@76.581,87.636 77.851,87.636 79.121,87.636 80.391,87.636 82.556,87.636 85.217,90.297 88.329,90.297 F3.1
MODE: U1.15 U8.3 | length 46
  Top Layer w0.254: v1(38.658,102.362) 38.658,102.984 40.178,104.504 40.178,109.952 v4(40.984,109.952) ; U8.3 39.732,118.516 v1(39.732,114.889) ; v1@41.275,92.837 v1(41.148,92.837) 40.64,92.329 40.64,91.135 40.97,90.805 45.085,90.805 45.847,91.567 45.847,92.456 46.228,92.837 46.228,93.091 46.764,93.627 U1.15
  Bottom Layer w0.254: v1@38.486,102.113 38.486,101.966 36.322,99.802 36.322,95.885 37.941,94.266 39.731,94.266 41.148,92.849 v1(41.148,92.837) ; v1@39.878,114.935 41.402,114.935 42.037,114.3 42.037,113.538 41.656,113.157 41.275,113.157 40.886,112.768 40.984,112.669 v4(40.984,109.952)
NetC6_2: C6.2 U1.40 | length 4.5
  Top Layer w0.254: U1.40 49.764,105.124 50.323,105.683 50.629,105.683 51.638,106.693 C6.2@51.638,107.315
NetD1_1: D1.1 R20.2 | length 4
  Top Layer w0.254: R20.2 95.855,114.935 97.155,114.935 97.536,115.316 D1.1@97.536,117.376
NetD2_1: D2.1 R21.2 | length 7.8
  Top Layer w0.254: D2.1@100.457,117.376 100.457,114.376 101.549,113.284 R21.2
NetD3_1: D3.1 R22.2 | length 7.7
  Top Layer w0.254: D3.1@103.251,117.376 103.251,115.697 103.505,115.443 105.664,115.443 107.188,116.967 R22.2
NetP3_1: P3.1 U6.5 | length 5.2
  Top Layer w0.254: U6.5 29.058,122.657 31.75,125.349 P3.1
NetP3_2: P3.2 U6.4 | length 6.8
  Top Layer w0.254: U6.4 30.378,122.174 32.029,123.825 33.782,123.825 34.29,124.333 P3.2
NetP3_3: P3.3 U7.5 | length 6.6
  Top Layer w0.254: U7.5 32.614,121.931 34.381,123.698 35.052,123.698 P3.3 P3.3@36.703,125.476
NetP3_4: P3.4 U7.4 | length 7.5
  Top Layer w0.254: U7.4 33.934,121.564 35.814,123.444 37.338,123.444 P3.4
NetP3_5: P3.5 U8.5 | length 6.7
  Top Layer w0.254: U8.5 37.751,122.353 38.715,123.317 39.751,123.317 P3.5
NetP3_6: P3.6 U8.4 | length 8.4
  Top Layer w0.254: U8.4 39.072,122.165 39.462,122.555 40.259,122.555 41.529,123.825 43.809,123.825 44.45,124.466 P3.6
NetP3_7: P3.7 U9.5 | length 7.2
  Top Layer w0.254: U9.5 43.028,122.657 43.688,123.317 44.45,123.317 44.958,123.825 46.482,123.825 46.99,124.333 P3.7
NetP3_8: P3.8 U9.4 | length 8.2
  Top Layer w0.254: U9.4 44.348,122.199 45.339,123.19 47.244,123.19 48.006,123.952 49.276,123.952 49.53,124.206 P3.8
NetP3_9: P3.9 U10.5 | length 7.5
  Top Layer w0.254: U10.5 47.981,122.911 48.514,123.444 49.756,123.444 50.645,124.333 51.868,124.333 52.07,124.535 P3.9
NetP3_10: P3.10 U10.4 | length 7.8
  Top Layer w0.254: U10.4 49.301,122.202 50.924,123.825 52.959,123.825 P3.10
NetP3_11: P3.11 U11.5 | length 6.1
  Top Layer w0.254: U11.5 53.442,122.276 55.245,124.079 55.753,124.079 P3.11
NetP3_12: P3.12 U11.4 | length 7.8
  Top Layer w0.254: U11.4 54.762,121.996 56.591,123.825 59.182,123.825 59.69,124.333 P3.12
NetP4_1: P4.1 P4.2 U4.5 | length 20.6
  Top Layer w0.254: P4.1 P4.2 27.051,94.996 32.131,100.076 v1@32.131,100.33 ; U4.5 36.17,106.578 36.703,106.045 v1(36.703,105.283)
  Bottom Layer w0.254: v1(32.059,100.584) 32.059,102.671 34.671,105.283 v1@36.449,105.283
NetP4_3: P4.3 P4.4 U4.4 | length 15.9
  Top Layer w0.254: P4.3 P4.4 29.718,99.949 31.242,101.473 35.179,101.473 35.523,101.817 35.523,101.901 35.56,101.938 35.56,103.741 35.447,103.854 34.834,103.854 34.834,105.171 U4.4
NetQ1_G: Q1.G R1.1 | length 5
  Top Layer w0.254: R1.1 65.653,104.267 Q1.G
NetQ2_G: Q2.G R2.1 | length 10.7
  Top Layer w0.254: R2.1 v1@70.231,102.743 ; v1(77.344,103.227) 78.462,103.227 78.861,103.626 Q2.G
  Bottom Layer w0.254: v1(70.486,102.719) 72.493,102.719 73.025,103.251 v1@77.216,103.251
NetQ3_G: Q3.G R3.1 | length 4.5
  Top Layer w0.254: R3.1 63.772,95.74 65.024,94.488 Q3.G
NetQ4_G: Q4.G R4.1 | length 9.9
  Top Layer w0.254: R4.1@75.997,101.346 75.997,94.437 76.2,94.234 Q4.G
NetQ5_G: Q5.G R5.1 | length 10.7
  Top Layer w0.254: R5.1 59.741,85.166 61.468,83.439 66.675,83.439 67.056,83.058 Q5.G
NetQ6_G: Q6.G R6.1 | length 21.9
  Top Layer w0.254: v1@64.262,90.551 R6.1 ; v1(79.757,83.753) 80.391,83.119 Q6.G
  Bottom Layer w0.254: v1(64.136,90.519) 64.136,89.79 70.233,83.693 v1@79.629,83.693
NetR13_2: R13.2 U2.VIN2 U4.1 | length 8.9
  Top Layer w0.254: U2.VIN2 31.496,109.093 ; U4.1 32.746,106.578 31.496,107.828 31.496,109.093 ; R13.2@32.817,108.287 33.096,108.566 32.569,109.093 31.496,109.093
NetR14_2: R14.2 U2.VIN1 U4.3 | length 12
  Top Layer w0.254: U2.VIN1 29.567,106.069 31.782,103.854 32.984,103.854 32.984,102.743 33.314,102.413 R14.2 34.29,103.454 32.817,104.927 U4.3
PWM: U1.14 U9.1 | length 41.3
  Top Layer w0.254: v1(37.515,102.108) 37.515,102.412 39.774,104.671 39.774,110.802 v4@39.624,110.952 ; v1(39.37,93.472) 40.259,93.472 42.184,95.397 43.668,95.397 45.466,93.599 45.847,93.599 46.264,94.016 U1.14 ; v1(41.129,114) 41.129,114.385 42.545,115.801 42.545,118.821 U9.1
  Bottom Layer w0.254: v1@37.505,102.108 36.977,101.58 36.977,101.299 35.814,100.136 35.814,95.377 37.719,93.472 v1(39.37,93.472) ; v4(39.624,111.079) 39.624,113.284 40.34,114 v1@41.021,114
RC: C9.2 R12.1 U1.16 | length 8.5
  Top Layer w0.254: U1.16 47.264,92.73 46.609,92.075 R12.1 C9.2@49.276,89.586
RDEAD: R11.1 U1.18 | length 8.6
  Top Layer w0.254: U1.18 48.264,94.119 48.031,93.887 48.031,92.031 48.264,91.798 48.264,91.313 48.764,91.313 49.399,90.678 49.765,90.678 49.857,90.586 50.46,90.586 50.552,90.678 51.105,90.678 R11.1
REF: R8.2 U1.20 | length 13.9
  Top Layer w0.254: v1(43.936,86.487) 43.936,87.827 R8.2@43.942,87.833 ; U1.20 49.264,93.103 49.657,92.71 49.657,91.44 49.784,91.44 v1@50.038,91.186
  Bottom Layer w0.254: v1@43.97,86.36 45.206,86.36 v1(50.159,91.313)
RESET: U1.2 U7.3 | length 25.5
  Top Layer w0.254: U7.3 33.934,118.521 34.798,117.657 v8(34.798,113.792) 34.798,113.665 35.687,112.776 40.843,112.776 42.037,111.582 42.037,102.616 42.962,101.691 U1.2
TACHO: U1.7 U10.3 | length 31.7
  Top Layer w0.254: v1@39.116,98.933 39.255,99.072 41.108,99.072 41.227,99.191 U1.7 ; v3(47.498,113.792) 48.264,114.558 48.264,115.193 48.514,115.443 49.657,115.443 49.911,115.697 49.911,118.567 U10.3
  Bottom Layer w0.254: v1(38.862,98.806) 40.386,98.806 41.529,99.949 41.529,102.426 47.371,108.268 47.371,113.411 v3@47.498,113.538
V5: C8.2 R8.1 R9.1 U1.3 U1.4 | length 24.4
  Top Layer w0.254: R8.1@43.942,89.713 41.529,89.713 R9.1 41.148,89.332 38.354,89.332 38.354,94.742 37.953,95.143 37.953,100.945 42.545,100.945 42.799,100.691 U1.4 U1.3
Va: F1.2 J1.7 P2.4 pad.5@96.647,85.217 | length 37
  Top Layer w0.254: F1.2@92.71,102.235 92.71,99.94 90.932,98.162 90.932,94.107 93.472,91.567 v1(95.752,91.567) ; P2.4 96.52,85.09 pad.5@96.647,85.217
  Top Layer w1: F1.2@92.71,102.235 F1.2 100.242,102.235 J1.7
  Bottom Layer w0.254: v1@95.885,91.567 96.52,90.932 P2.4
Vb: F2.2 J1.8 P2.5 pad.5@94.107,85.268 | length 45.3
  Top Layer w0.254: F2.2@91.059,111.252 91.059,108.585 v5(91.694,107.95) ; P2.5 93.98,85.141 pad.5@94.107,85.268
  Top Layer w1: F2.2@91.059,111.252 99.235,111.252 J1.8
  Bottom Layer w0.254: v5@91.821,108.077 92.202,108.077 93.98,106.299 P2.5
Vc: F3.2 J1.4 P2.6 pad.5@91.44,85.268 | length 49.6
  Top Layer w0.254: pad.5@91.44,85.268 P2.6 89.713,82.55 89.154,83.109 89.154,87.376 89.662,87.884 91.313,87.884 91.63,88.201 F3.2 ; J1.4 J1.4@97.527,108.34
  Top Layer w1: F3.2@91.694,90.297 102.616,90.297 104.267,91.948 104.267,105.41 103.505,106.172 99.695,106.172 J1.4@97.527,108.34
VCC: C4.2 C5.2 JM.1 pad.4 Q1.D Q3.D Q5.D R20.1 U1.24 U1.45 | length 144
  Top Layer w0.254: v1@40.941,117.729 40.941,114.982 40.178,114.219 40.178,113.284 40.817,113.284 40.828,113.273 40.984,113.273 42.962,111.295 42.962,107.025 44.272,105.715 47.066,105.715 47.264,105.517 U1.45 ; U1.24 51.834,95.141 v2@52.197,94.778 ; v3(59.182,117.856) 61.029,117.856 61.156,117.729 61.156,116.459 ; v2(61.535,87.598) 61.624,87.509 Q5.D@63.246,87.509 ; JM.1 93.091,122.682 95.504,125.095 pad.4 96.774,124.968 v7(100.33,124.968)
  Top Layer w0.5: 61.156,116.459 63.373,116.459 63.881,115.951 63.881,112.014 64.707,111.188 69.723,111.188 ; Q1.D@71.761,108.585 71.761,109.15
  Top Layer w1: 69.723,111.188 71.761,109.15 73.863,111.252 78.664,111.252 79.553,112.141 79.553,115.697 80.137,115.697 82.169,117.729 90.932,117.729 ; JM.1 91.821,120.777 90.868,119.825 90.868,117.792 90.932,117.729 ; R20.1@93.599,115.062 90.932,117.729
  Top Layer w1.1: Q5.D@63.246,87.509 64.516,87.509 65.786,87.509 67.056,87.509 68.459,87.509 71.761,90.811 71.761,94.488 71.761,95.758 71.761,97.028 71.761,98.298 71.761,104.775 71.761,106.045 71.761,107.315 Q1.D@71.761,108.585
  Bottom Layer w0.254: v1(40.875,117.81) 59.136,117.81 v3(59.182,117.856) ; v2(52.391,94.361) 59.249,87.503 v2@61.341,87.503
VDSTH: R9.2 R10.1 U1.23 | length 28.2
  Top Layer w0.254: R10.1 36.398,89.459 36.703,89.154 36.703,86.741 37.465,85.979 41.275,85.979 ; R9.2 41.275,85.979 ; v1(43.809,85.344) 41.91,85.344 41.275,85.979 ; U1.23 50.764,94.143 51.181,93.726 51.181,93.345 v1@52.197,92.329
  Bottom Layer w0.254: v1@43.82,85.344 45.212,85.344 50.454,90.586 50.46,90.586 52.203,92.329 v1(52.07,92.329)
pads on no net: JM.None U1.1 U1.13 U1.37 U1.47 U1.48

## Other copper
Top Layer:
  rectangle net CSN: 86.36,91.948 89.916,99.187
  rectangle net AGND: 46.101,80.137 56.388,86.741
  rectangle net CSN: 45.974,96.691 51.054,101.981
Bottom Layer:
  rectangle net AGND: 30.607,77.47 56.007,81.28
  rectangle net CSN: 86.106,82.042 89.535,95.113
  rectangle net CSN: 81.915,82.042 87.757,85.852
  rectangle net CSN: 75.438,84.582 83.312,86.741
  rectangle net CSN: 68.453,85.979 79.941,91.567
  rectangle net CSN: 54.991,93.599 63.119,97.409
  rectangle net CSN: 61.214,91.821 65.532,108.331
  rectangle net CSN: 62.484,103.886 76.454,108.34
  rectangle net CSN: 45.206,96.52 50.927,102.616
  rectangle net CSN: 60.071,112.395 84.455,120.777
  rectangle net AGND: 29.342,90.424 33.655,97.556
  rectangle net AGND: 40.418,80.645 55.626,81.788
  rectangle net AGND: 33.02,80.645 42.037,86.487
  rectangle net AGND: 32.131,90.424 36.703,93.091
  rectangle net AGND: 25.781,81.153 33.533,90.586

## Silkscreen, mask and mechanical layers (free items; w line width, h text height)
Top Overlay:
  lines w0.254: 28.321,92.202 28.829,92.202 28.829,94.742 28.321,94.742 ; 28.321,97.282 28.829,97.282 28.829,99.949 28.321,99.949 ; 98.806,123.952 98.806,123.959
  text "GND" at 65.532,124.587 h1
  text "VCC" at 96.52,122.682 h1
  text "5V" at 99.822,122.682 h1
  text "3V3" at 102.147,122.682 h1
  text "ff1" at 48.514,122.301 h0.9 r35
  text "dir" at 59.337,122.276 h0.9 r35
  text "pwm" at 45.764,122.202 h0.9 r35
  text "esf" at 35.523,122.165 h0.9 r35
  text "ff2" at 51.042,122.165 h0.9 r35
  text "diro" at 32.385,121.92 h0.9 r35
  text "brk" at 56.058,121.931 h0.9 r35
  text "tach" at 52.832,121.793 h0.9 r35
  text "reset" at 37.338,121.666 h0.8 r35
  text "mode" at 42.672,121.666 h0.9 r35
  text "coast" at 28.453,121.564 h0.9 r35
  text "csout" at 39.624,121.361 h0.9 r35
  text "D" at 29.342,115.697 h1
  text "E" at 31.75,115.697 h1
  text "C" at 27.051,115.443 h1
  text "R" at 34.417,114.681 h1
  text "F1" at 44.272,114.681 h0.9
  text "D" at 49.149,113.157 h1
  text "CS" at 36.068,112.038 h0.9
  text "PWM" at 38.608,111.887 h0.9
  text "AGND" at 51.562,111.76 h1
  text "MODE" at 41.13,110.803 h0.9
  text "Vin" at 30.607,110.109 h0.8 r35
  text "V2" at 30.734,108.458 h0.8 r35
  text "Vc" at 92.583,108.077 h0.8
  text "Vb" at 104.267,107.95 h0.8
  text "AG" at 30.607,106.68 h0.8 r35
  text "V1" at 30.836,105.156 h0.8 r35
  text "Va" at 104.14,104.013 h0.8
  text "VHall" at 90.805,103.632 h0.8
  text "H2" at 92.71,99.441 h0.8
  text "V1" at 29.21,99.187 h1 r270
  text "G" at 104.267,99.187 h0.8
  text "H1" at 92.837,95.377 h0.8
  text "H3" at 103.886,95.016 h0.8
  text "V2" at 29.21,94.234 h1 r270
  text "Vc" at 90.805,86.614 h0.8
  text "Vb" at 93.472,86.614 h0.8
  text "Va" at 96.012,86.614 h0.8
  text "H3" at 98.552,86.614 h0.8
  text "H2" at 100.965,86.538 h0.8
  text "H1" at 103.505,86.487 h0.8
Mechanical 1:
  the board outline again, w1.2